# Altium PCB computer.PcbDoc
Units mil, origin at the board's own origin, x right, y up, seen from the top; angles counter-clockwise.
Board outline 2640 x 1345 mil, 2 copper layers (Top Layer, Bottom Layer); 20 components, 22 nets, 129 pads, 16 vias.
Unrouted connection lines stored in the file: 5.
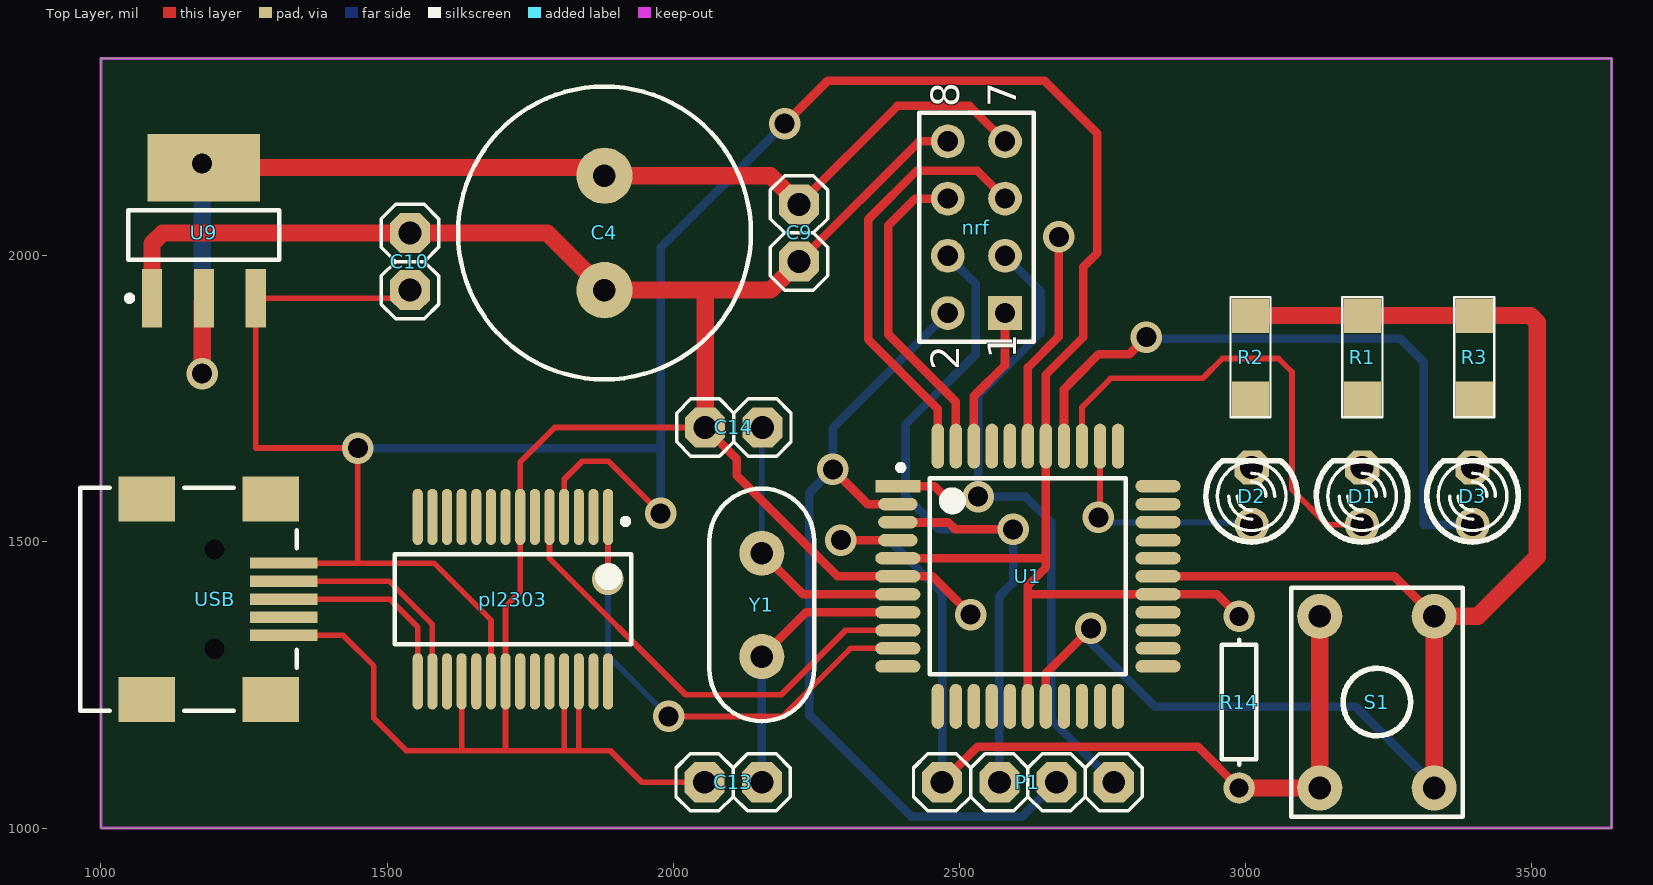
[diagram p0: Top Layer view]
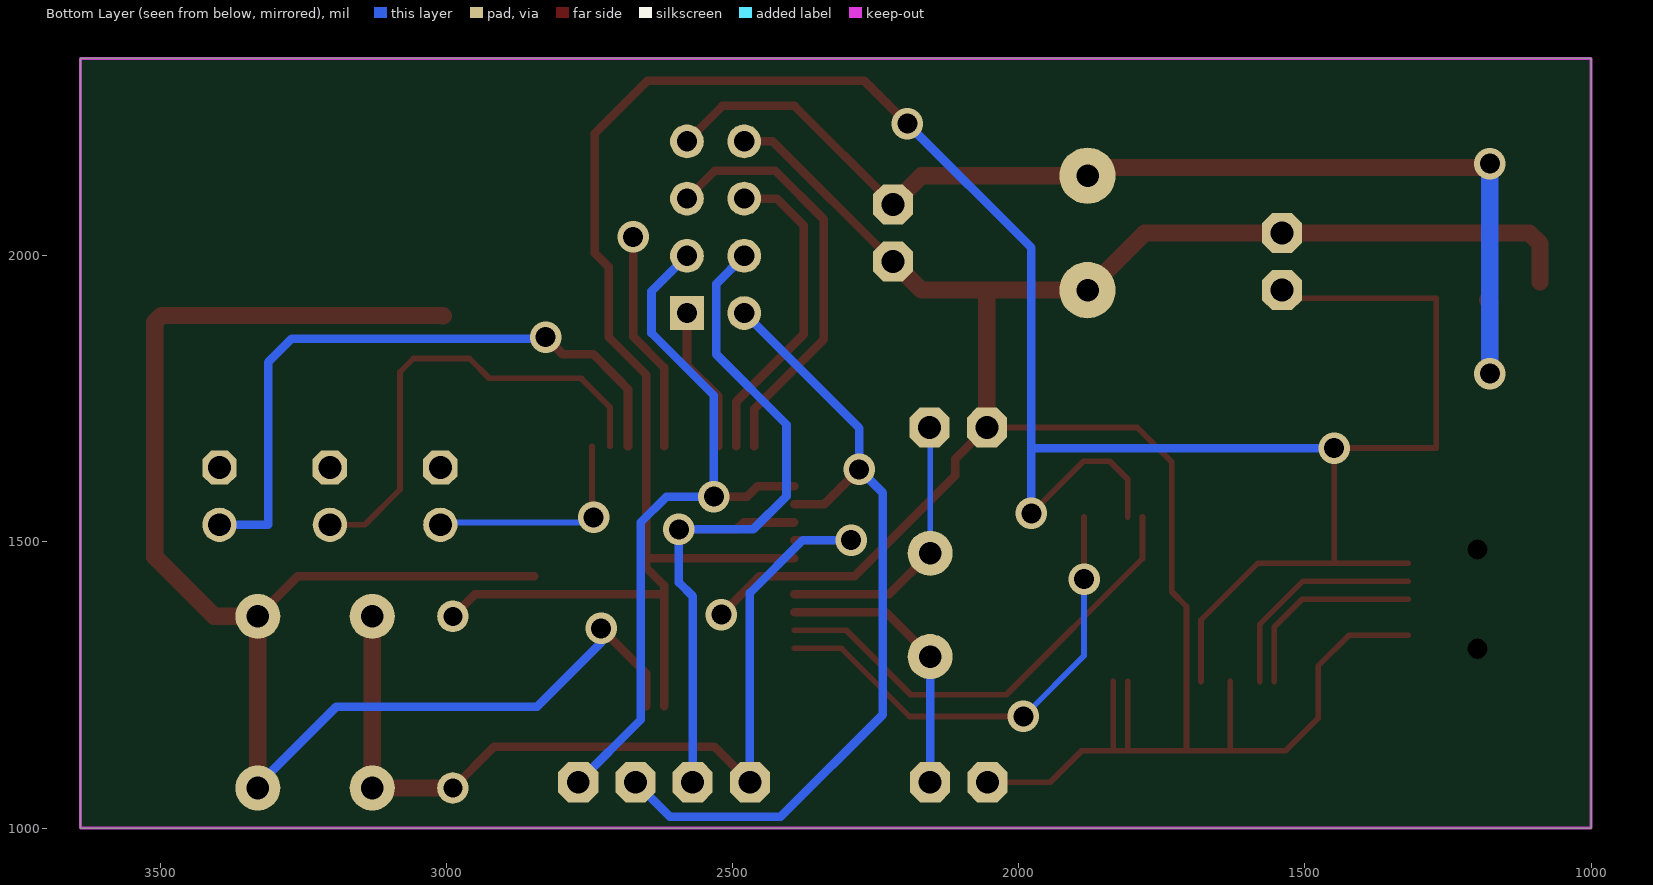
[diagram p1: Bottom Layer view, seen from below]

## Layer stack, top to bottom
Top Layer: signal copper 1.4
Dielectric: dielectric 12.6, FR-4, Dk 4.8
Bottom Layer: signal copper 1.4

## Board outline
1000,1000 3640,1000 3640,2345 1000,2345

## Design rules (kind name [scope] priority, off if disabled: settings)
Clearance [All] p1: gap=25
FabricationTestPointUsage TestPointUsage [All] p1: valid=0 allowmultiple=FALSE
FabricationTestpoint Testpoint [All] p1: side=3 testpointundercomponent=TRUE minsize=40 maxsize=100 preferedsize=60 minholesize=0 maxholesize=40 preferedholesize=32 testpointgrid=1 allowsidetop=TRUE allowsidebottom=TRUE usegrid=TRUE gridtolerance=0.01
PolygonConnect [All] p1: connectstyle=Relief reliefconductorwidth=10 reliefentries=4 polygonreliefangle="90 Angle" airgapwidth=10
RoutingVias [All] p1: holewidth=28 width=50 viastyle="Through Hole" minholewidth=28 minwidth=50 maxholewidth=28 maxwidth=50
SilkToSolderMaskClearance SilkscreenOverComponentPads [IsPad] p1: minsilkscreentomaskgap=10 clearancetoexposedcopper=TRUE
SolderMaskExpansion [All] p1: expansion=4
Width [All] p1: maxlimit=30 minlimit=10 preferedwidth=20
25 further rules are at their usual default settings.

## Components (designator, comment, footprint, x,y, rotation, side; value= is the part's Value field where it differs from the comment)
C4 "Cap2" cap 1880,2040 r270 top
C9 "Cap" H1X02F 2220,2040 r270 top
C10 "Cap" H1X02F 1540,1990 r90 top
C13 "Cap" H1X02F 2105,1080 r180 top
C14 "Cap" H1X02F 2106,1700 r0 top
D1 "LED0" LED3MM 3204,1580 r90 top
D2 "LED0" LED3MM 3011,1580 r90 top
D3 "LED0" LED3MM 3397,1580 r90 top
nrf "Header 4X2" HDR2X4 2580,1900 r90 top
P1 "Header 4" H1X04F 2620,1080 r180 top
pl2303 "pl2303" SSOP28 1720,1400 r270 top
R1 "Res1" smd[1206] 3204.5,1823 r270 top
R2 "Res1" smd[1206] 3009,1823 r270 top
R3 "Res1" smd[1206] 3400,1823 r270 top
R14 "Res1" AXIAL-0.3 2989,1220 r270 top
S1 "SW-PB" PB4 3230,1220 r0 top
U1 "ATmega32-16AC" TQFP44 2620,1440 r0 top
U9 "LM1117-3.3" SOT223 1180,2040 r90 top
USB "440247-2" MiniUSB-B 1200,1400 r180 top
Y1 "XTAL" CRYSTALL 2155,1390 r90 top

## Footprints (in the part's own frame and the unit in brackets; to place one, negate y for a bottom-side part, rotate by r counter-clockwise, add the part's x,y. Pads: shape width x height; smd on the part's side, far side on the other; paste and mask are expansions set on the pad)
AXIAL-0.3 [mm] "Resistor; 2 Leads"
  round 1.4 hole 0.85: 1(-3.81,0) 2(3.81,0)
  silkscreen extent -2.77,-0.76 2.77,0.76
cap [mm]
  round 2.5 hole 1: 1(-2.54,0) 2(2.54,0)
  silkscreen extent -6.5,-6.5 6.5,6.5
CRYSTALL [mm]
  round 2 hole 1: 1(-2.293,0) 2(2.293,0)
  silkscreen extent -5.16,-2.32 5.16,2.32
H1X02F [mil]
  oct 70x70 hole 40: 1(-50,0) 2(50,0)
  silkscreen extent -100,-50 100,50
H1X04F [mil]
  oct 70x70 hole 40: 1(-150,0) 2(-50,0) 3(50,0) 4(150,0)
  silkscreen extent -200,-50 200,50
HDR2X4 [mm] "Connector; Header; 4x2 Position"
  rect 1.5x1.5 hole 0.9: 1(0,0)
  round 1.5 hole 0.9: 2(0,2.54) 3(2.54,0) 4(2.54,2.54) 5(5.08,0) 6(5.08,2.54) 7(7.62,0) 8(7.62,2.54)
  silkscreen extent -1.27,-1.27 8.89,3.81
LED3MM [mil]
  round 60 hole 40: 1(-50,0)
  oct 60x60 hole 40: 2(50,0)
  silkscreen extent -80,-80 62,80
MiniUSB-B [mm]
  rect 3x0.5 smd: 1(-3.04,-1.6) 2(-3.04,-0.8) 3(-3.04,0) 4(-3.04,0.8) 5(-3.04,1.6)
  rect 2.5x2 smd: 6(-2.459,4.45) 7(3.041,4.45) 8(-2.459,-4.45) 9(3.041,-4.45)
  round 0.6 hole 0.9 unplated: MH1(0.041,2.2) MH2(0.041,-2.2)
  silkscreen extent -3.61,-4.95 5.99,4.95
PB4 [mm]
  round 2 hole 1: 1(2.54,-3.81) 1(2.54,3.81) 2(-2.54,-3.81) 2(-2.54,3.81)
  silkscreen extent -3.81,-5.08 3.81,5.08
smd[1206] [mil]
  rect 60x65 smd: 1(-72.5,0) 2(72.5,0)
  silkscreen extent -105,-35 105,35
SOT223 [mm]
  rect 2.6x0.9 smd: 1(-2.9,2.3) 2(-2.9,0) 3(-2.9,-2.3)
  rect 3x5 smd: 4(2.9,0)
  silkscreen extent -3.02,-3.35 1,3.42
SSOP28 [mm]
  oval 2.5x0.45 smd: 1(-3.65,4.225) 2(-3.65,3.575) 3(-3.65,2.925) 4(-3.65,2.275) 5(-3.65,1.625) 6(-3.65,0.975) 7(-3.65,0.325) 8(-3.65,-0.325) 9(-3.65,-0.975) 10(-3.65,-1.625) 11(-3.65,-2.275) 12(-3.65,-2.925) 13(-3.65,-3.575) 14(-3.65,-4.225) 15(3.65,-4.225) 16(3.65,-3.575) 17(3.65,-2.925) 18(3.65,-2.275) 19(3.65,-1.625) 20(3.65,-0.975) 21(3.65,-0.325) 22(3.65,0.325) 23(3.65,0.975) 24(3.65,1.625) 25(3.65,2.275) 26(3.65,2.925) 27(3.65,3.575) 28(3.65,4.225)
  silkscreen extent -3.57,-5.25 2,5.25
TQFP44 [mm]
  rect 2x0.55 smd: 1(-5.775,4)
  oval 1.75x0.55 smd: 2(-5.775,3.2) 3(-5.775,2.4) 4(-5.775,1.6)
  oval 2x0.55 smd: 5(-5.775,0.8) 6(-5.775,0) 7(-5.775,-0.8) 8(-5.775,-1.6) 9(-5.775,-2.4) 10(-5.775,-3.2) 11(-5.775,-4) 23(5.775,-4) 24(5.775,-3.2) 25(5.775,-2.4) 26(5.775,-1.6) 27(5.775,-0.8) 28(5.775,0) 29(5.775,0.8) 30(5.775,1.6) 31(5.775,2.4) 32(5.775,3.2) 33(5.775,4)
  oval 0.55x2 smd: 12(-4,-5.775) 13(-3.2,-5.775) 14(-2.4,-5.775) 15(-1.6,-5.775) 16(-0.8,-5.775) 17(0,-5.775) 18(0.8,-5.775) 19(1.6,-5.775) 20(2.4,-5.775) 21(3.2,-5.775) 22(4,-5.775) 34(4,5.775) 35(3.2,5.775) 36(2.4,5.775) 37(1.6,5.775) 38(0.8,5.775) 39(0,5.775) 40(-0.8,5.775) 41(-1.6,5.775) 42(-2.4,5.775) 43(-3.2,5.775) 44(-4,5.775)
  silkscreen extent -5.77,-4.35 4.35,4.95, body extent -5,-5 5,5, height 1.2

## Part data
C4 C9 C10 C13 C14: "Capacitor"
D1 D2 D3: "Typical INFRARED GaAs LED"
nrf: "Header, 4-Pin, Dual row"
P1: "Header, 4-Pin"
pl2303: library part ft232rl, "ft232rl USB <> UART"
R1 R2 R3 R14: "Resistor"
S1: "Switch"
U1: "8-Bit AVR Microcontroller with 32K Bytes of In-System Programmable Flash Memory"
U9: library part LF33ABV, "500mA, Very Low Drop (0.45V) Voltage Regulator"
USB: "USB 2.0, Right Angle, SMT, B Type, Receptacle, 5 Position, Black"
Y1: "Crystal Oscillator"

## Via types
v1: diameter 55, hole 35, Top Layer to Bottom Layer, 16 vias

## Nets (pads, with @x,y where several pads share a name; then routed paths per layer and width w, separated by ;. In a path a pad name is that pad's centre, name@x,y a point inside that pad or via, vN(x,y) a via of type N, cw(c..) or ccw(c..) an arc to the next point about the centre after c; other vN are vias at no path point)
3.3: C4.1 C9.1 nrf.7 U9.2 | length 2017.8
  Top Layer w15: C9.1 2392,2262 2518,2262 nrf.7
  Top Layer w30: v1(1177,1794) 1177,1919 U9.2@1181,1923 ; v1@1180,2154.17 1864.83,2154.17 C4.1@1878,2141 ; C4.1 2170,2140 C9.1
  Bottom Layer w30: v1@1177,1795 v1(1177,2161)
5: C10.1 pl2303.4 pl2303.20 R14.1 U1.5 U1.17 U1.27 U1.38 U9.3 USB.1 | length 5311.1
  Top Layer w10: USB.1 1449,1462.99 ; C10.1@1542,1936 1531.83,1925.83 U9.3 1270.55,1664 v1(1449,1664) 1449,1462.99 ; pl2303.20 1681.61,1363.39 1582.01,1462.99 1449,1462.99 ; pl2303.4 1809.57,1609.57 1841,1641 1887,1641 v1(1978,1550)
  Top Layer w15: v1(2195,2231) 2270,2306 2649,2306 2741,2214 2741,2005 2717,1981 2717,1858 2651.5,1792.5 U1.38 2651.5,1455.5 2620,1424 U1.17 ; U1.5 2645.5,1471.5 ; 2620.5,1408.5 U1.27 2950.5,1408.5 R14.1
  Bottom Layer w15: v1(1449,1664) 1976,1664 ; v1@1978,1553 1978,2014 v1(2195,2231)
A: D2.1 U1.35 | length 403.3
  Top Layer w10: v1@2745.98,1534.02 U1.35
  Bottom Layer w10: v1@2742,1534 D2.1@3012,1534
  other v1: 2743,1543
B: D1.1 U1.36 | length 833
  Top Layer w10: U1.36 2714.49,1735.49 2764,1785 ; 2764.2,1786 2925.43,1786 2959.93,1820.5 3058.07,1820.5 3081.5,1797.07 3081.5,1591.5 3143,1530 D1.1
C: D3.1 U1.37 | length 1149.4
  Top Layer w15: U1.37 2682.99,1766.99 2701,1785 ; 2700.78,1785.22 2743.57,1828 2797,1828 v1(2827,1858)
  Bottom Layer w15: v1@2830,1855 3271,1855 3312,1814 3312,1530 D3.1
CE_S: nrf.6 U1.43 | length 558
  Top Layer w15: nrf.6 2423,2100 2376,2053 2376,1863 2494.02,1744.98 U1.43
CSN_S: nrf.5 U1.44 | length 741.5
  Top Layer w15: U1.44 2462.52,1732.48 2341,1854 2341,2064 2426,2149 2531,2149 nrf.5
GND: C4.2 C9.2 C10.2 C13.2 C14.1 nrf.8 pl2303.7 pl2303.18 pl2303.21 pl2303.25 pl2303.26 R1.1 R2.1 R3.1 S1.1 U1.6 U1.18 U1.28 U1.39 U9.1 USB.5 | length 7821.1
  Top Layer w10: USB.5 1422.99,1337.01 1477,1283 1477,1192 1534,1135 1890,1135 1945,1080 C13.2 ; 1630.43,1135.57 pl2303.18 ; 1707.2,1138.8 pl2303.21 1707.2,1387.2 1732.8,1412.8 pl2303.7 1732.8,1639.8 1793,1700 C14.1 ; 1809.57,1135.43 pl2303.25 ; 1835.16,1136.16 pl2303.26
  Top Layer w15: C14.1 2111,1645 2111,1616 2287,1440 U1.6 2453,1440 v1(2520,1373) ; C9.2 2430,2200 nrf.8 ; U1.39 2620,1805 2674,1859 v1(2674,2033) ; U1.18 2651.5,1270.5 v1(2730,1349) ; U1.28 3260,1440 S1.1@3330,1370
  Top Layer w30: U9.1@1089,1954 1089,2021 1108,2040 C10.2 1780,2040 C4.2 2170,1940 C9.2 ; C14.1 2056,1933 ; R2.1@3006,1895 3006.5,1895.5 R2.1 R1.1 R3.1 3498.5,1895.5 3510,1884 3510,1474 3406,1370 S1.1@3330,1370 ; S1.1@3330,1085 S1.1@3330,1370 ; S1.1@3330,1385 S1.1@3330,1370
  Bottom Layer w15: v1(2730,1349) 2730,1324 2842,1212 3193,1212 S1.1@3331,1074
IRQ_S: nrf.1 U1.42 | length 255.2
  Top Layer w15: U1.42 2525.51,1754.51 2580,1809 nrf.1
MISO1: nrf.2 P1.2 U1.2 | length 1471.7
  Top Layer w15: v1(2279,1627) 2340.02,1565.98 U1.2
  Bottom Layer w15: nrf.2 2279,1699 v1(2279,1627) 2238,1586 2238,1198 2416,1020 2610,1020 P1.2
MOSI1: nrf.3 P1.1 U1.1 | length 1285.6
  Top Layer w15: U1.1 2456.52,1597.48 2475,1579 v1(2533,1579)
  Bottom Layer w15: nrf.3 2642,1938 2642,1865 2533,1756 v1(2533,1579) 2616,1579 2661,1534 2661,1189 P1.1
NetC13_1: C13.1 U1.8 Y1.1 | length 489.4
  Top Layer w15: Y1.1 2232.28,1377.01 U1.8
  Bottom Layer w15: C13.1 Y1.1
NetC14_2: C14.2 U1.7 Y1.2 | length 486.1
  Top Layer w15: Y1.2 2226.77,1408.5 U1.7
  Bottom Layer w10: Y1.2 C14.2@2155,1699
NetD1_2: D1.2 R1.2
NetD2_2: D2.2 R2.2
NetD3_2: D3.2 R3.2
Netpl2303_15: pl2303.15 USB.3 | length 349.2
  Top Layer w10: USB.3 1505,1400 1553.66,1351.34 pl2303.15
Netpl2303_16: pl2303.16 USB.2 | length 390.4
  Top Layer w10: USB.2 1503.5,1431.5 1579.25,1355.75 pl2303.16
RST1: P1.4 R14.2 S1.2 U1.4 | length 1661.2
  Top Layer w15: v1(2293,1503) U1.4 ; P1.4 2532,1142 2917,1142 R14.2
  Top Layer w30: R14.2 S1.2@3130,1070 ; S1.2@3130,1085 3130,1370 S1.2@3130,1385
  Bottom Layer w15: v1(2293,1503) 2378,1503 2470,1411 P1.4
RX: pl2303.1 U1.10 | length 842.2
  Top Layer w10: v1@1886.34,1435.34 pl2303.1 ; v1(1992,1195) 2191,1195 2310.02,1314.02 U1.10
  Bottom Layer w10: v1(1886,1435) 1886,1301 v1(1992,1195)
SCK1: nrf.4 P1.3 U1.3 | length 1361.7
  Top Layer w15: U1.3 2393.13,1534 2481,1534 2493,1522 v1(2594,1522)
  Bottom Layer w15: nrf.4 2529,1951 2529,1828 2406,1705 2406,1580 2464,1522 v1(2594,1522) 2594,1429 2570,1405 P1.3
TX: pl2303.5 U1.9 | length 826.5
  Top Layer w10: pl2303.5 1783.98,1471.02 2022,1233 2189,1233 2301.51,1345.51 U1.9
pads on no net: pl2303.2 pl2303.3 pl2303.6 pl2303.8 pl2303.9 pl2303.10 pl2303.11 pl2303.12 pl2303.13 pl2303.14 pl2303.17 pl2303.19 pl2303.22 pl2303.23 pl2303.24 pl2303.27 pl2303.28 U1.11 U1.12 U1.13 U1.14 U1.15 U1.16 U1.19 U1.20 U1.21 U1.22 U1.23 U1.24 U1.25 U1.26 U1.29 U1.30 U1.31 U1.32 U1.33 U1.34 U1.40 U1.41 U9.4 USB.4 USB.6 USB.7 USB.8 USB.9 USB.MH1 USB.MH2

## Keep-outs
Keep-Out Layer:
  the board outline again, w5

## Text inside footprints (layer, text, board x,y; h text height)
nrf: Top Overlay "2" at 2500,1800 h50 r90; Top Overlay "1" at 2600,1820 h50 r90; Top Overlay "7" at 2600,2260 h50 r90; Top Overlay "8" at 2500,2260 h50 r90
USB: Mechanical 1 "PCB Edge" at 974.7,1558.91 h9.84 r270